# Altium PCB NODE_DEV_V2.PcbDoc
Units mil, origin at the board's own origin, x right, y up, seen from the top; angles counter-clockwise.
Board outline 2340 x 2861.85 mil, 4 copper layers (Top Layer, Signal Layer 1, Signal Layer 2, Bottom Layer), stack 30.634 mil thick; 101 components, 93 nets, 391 pads, 639 vias.
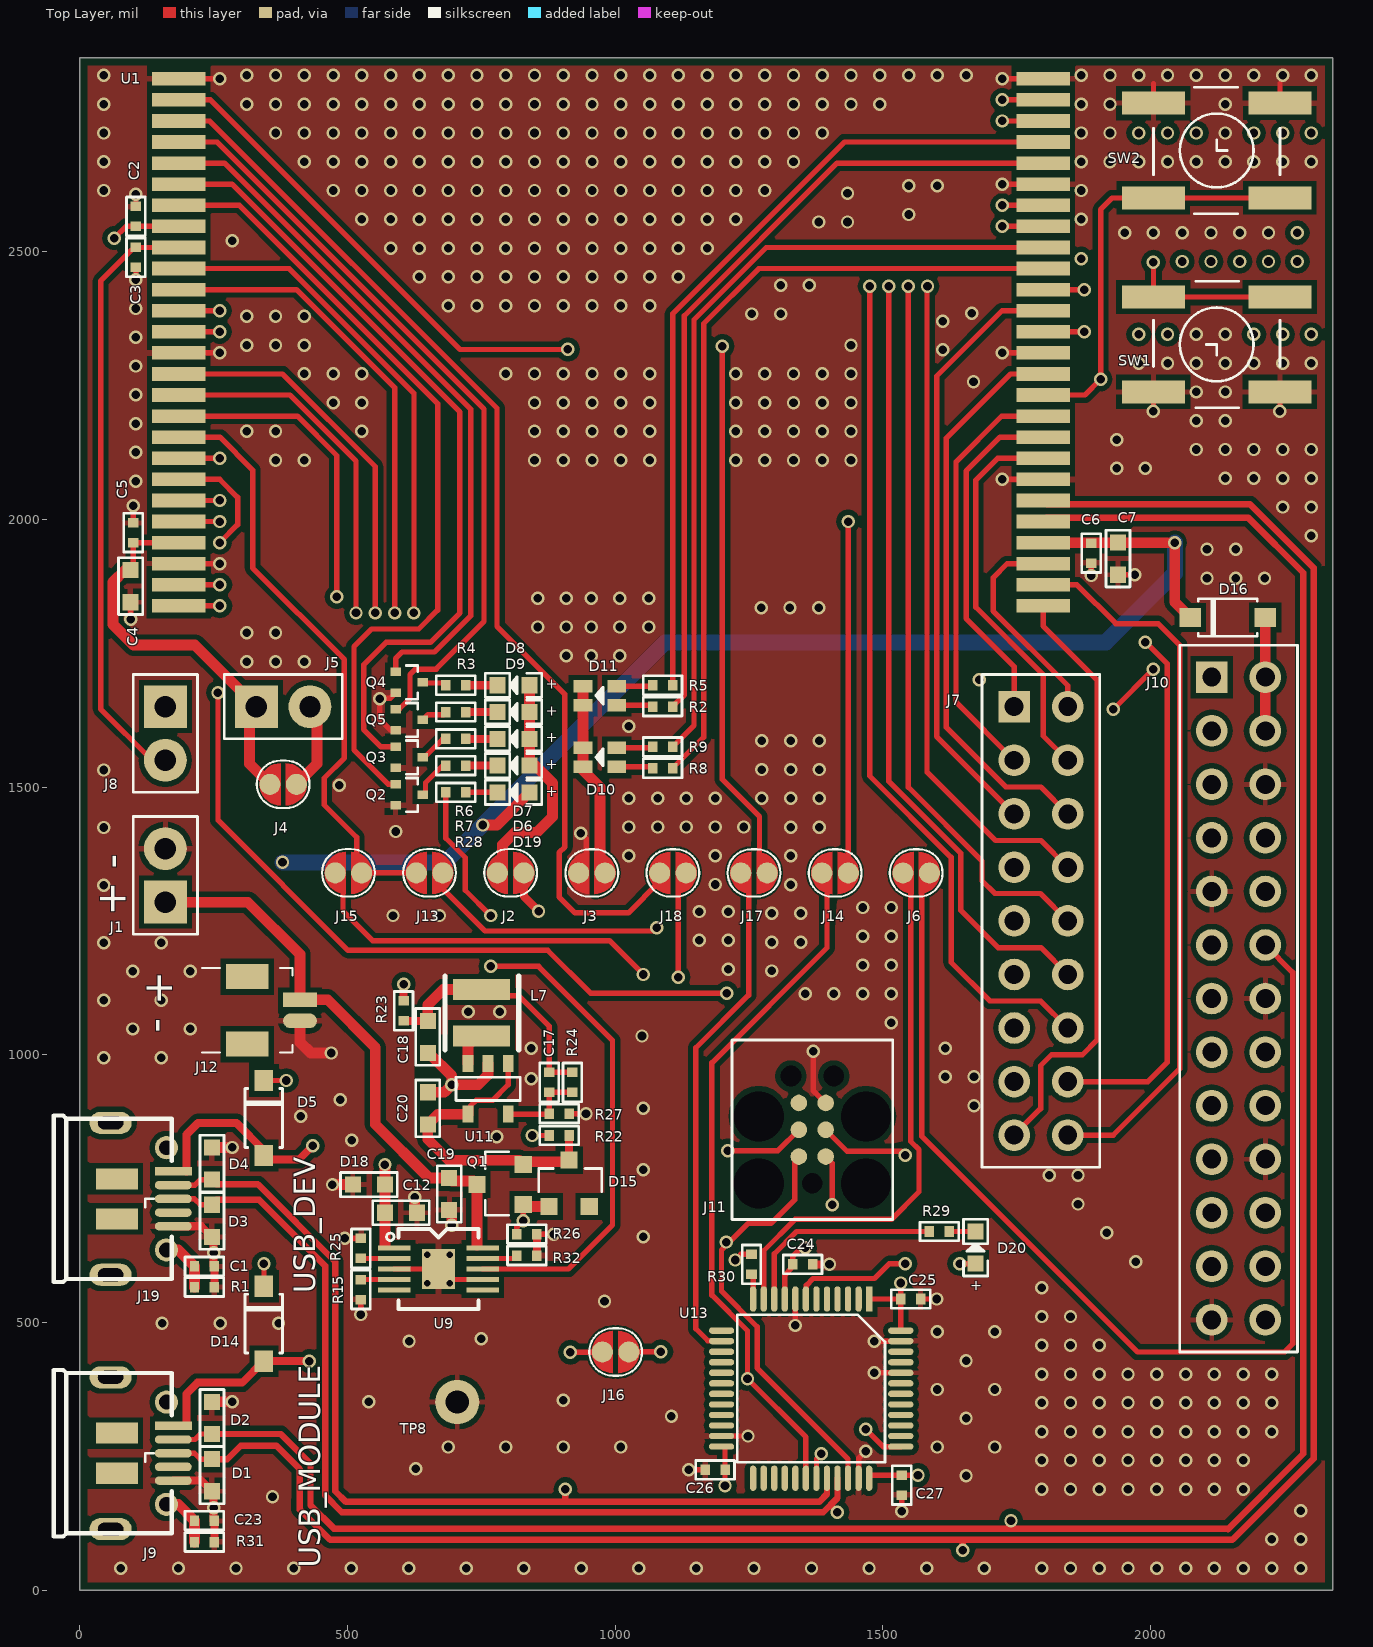
[diagram p0: Top Layer view]
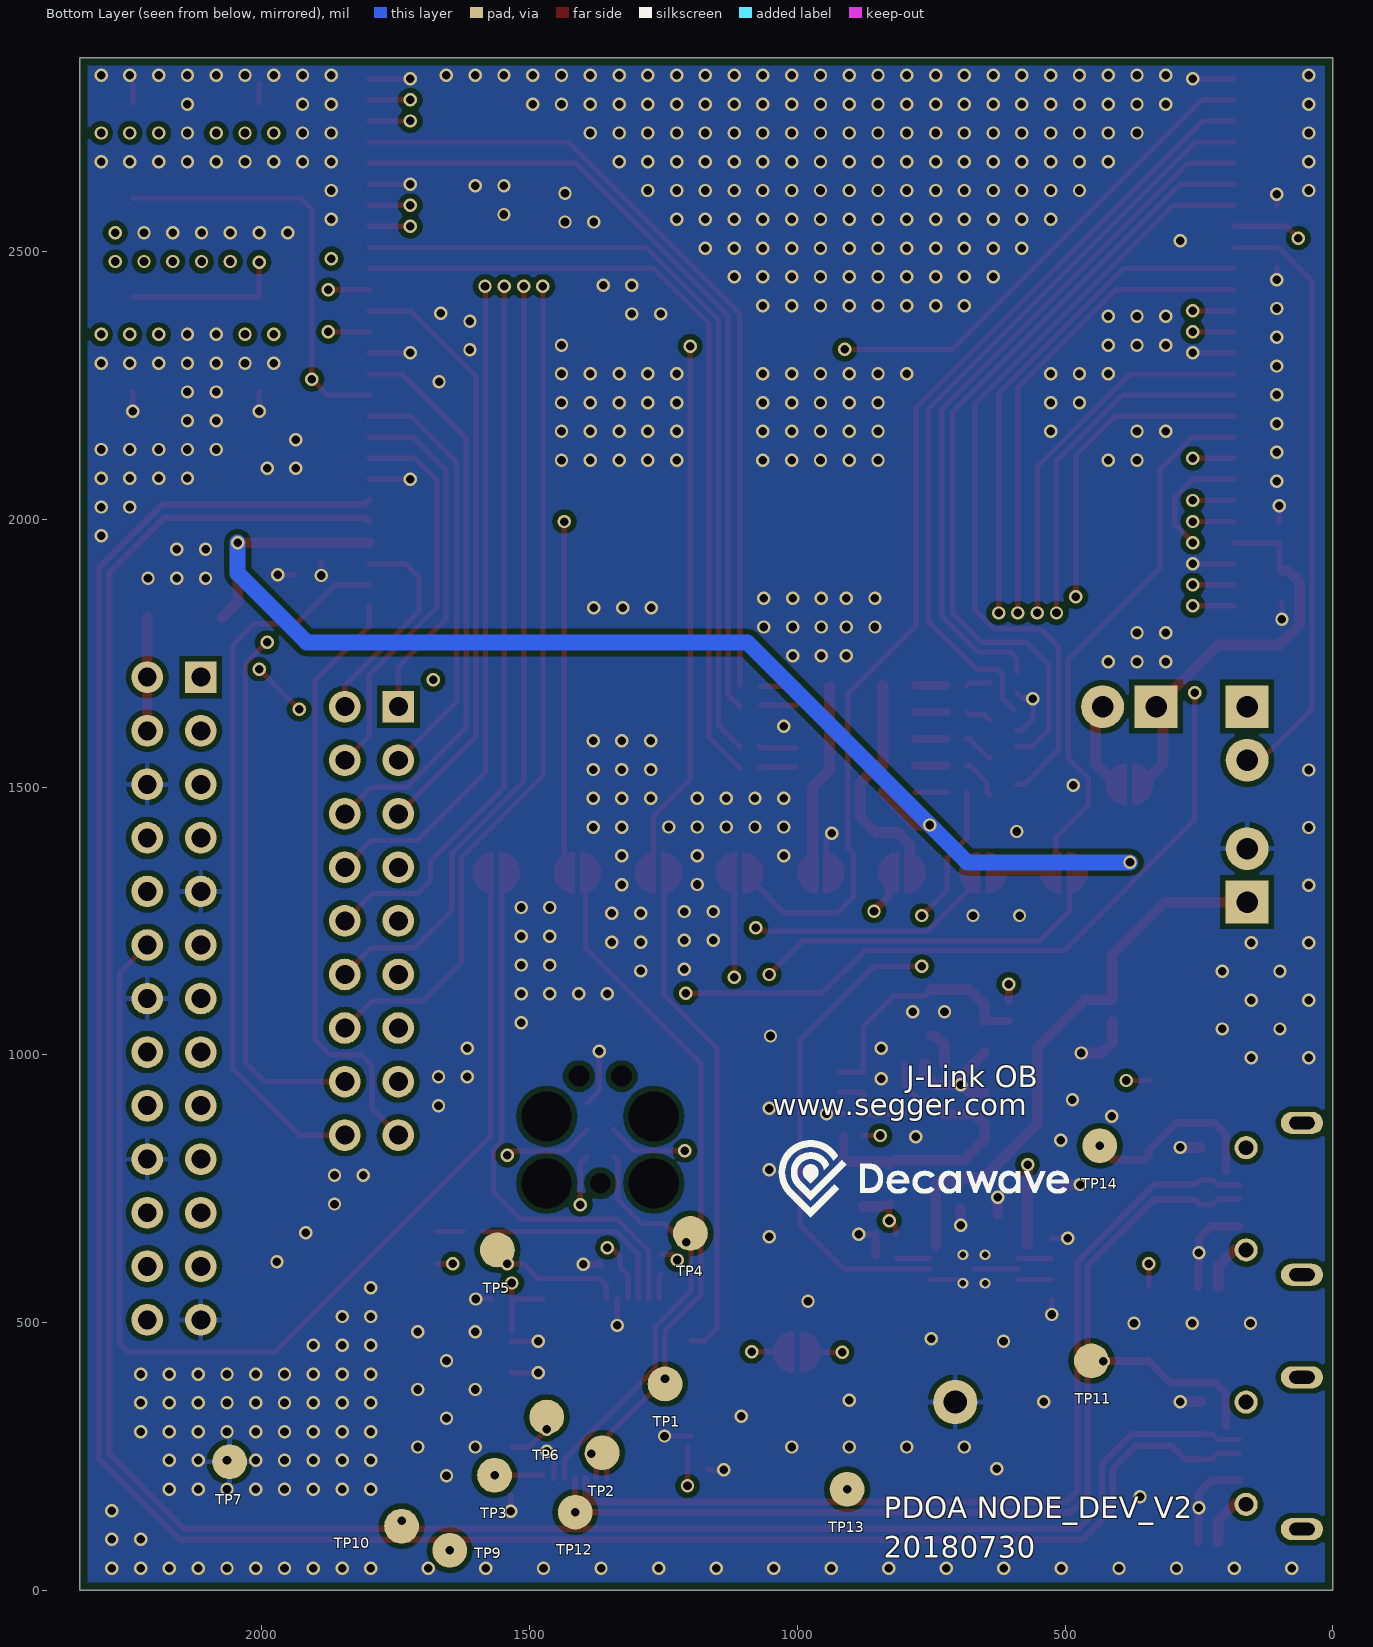
[diagram p1: Bottom Layer view, seen from below]
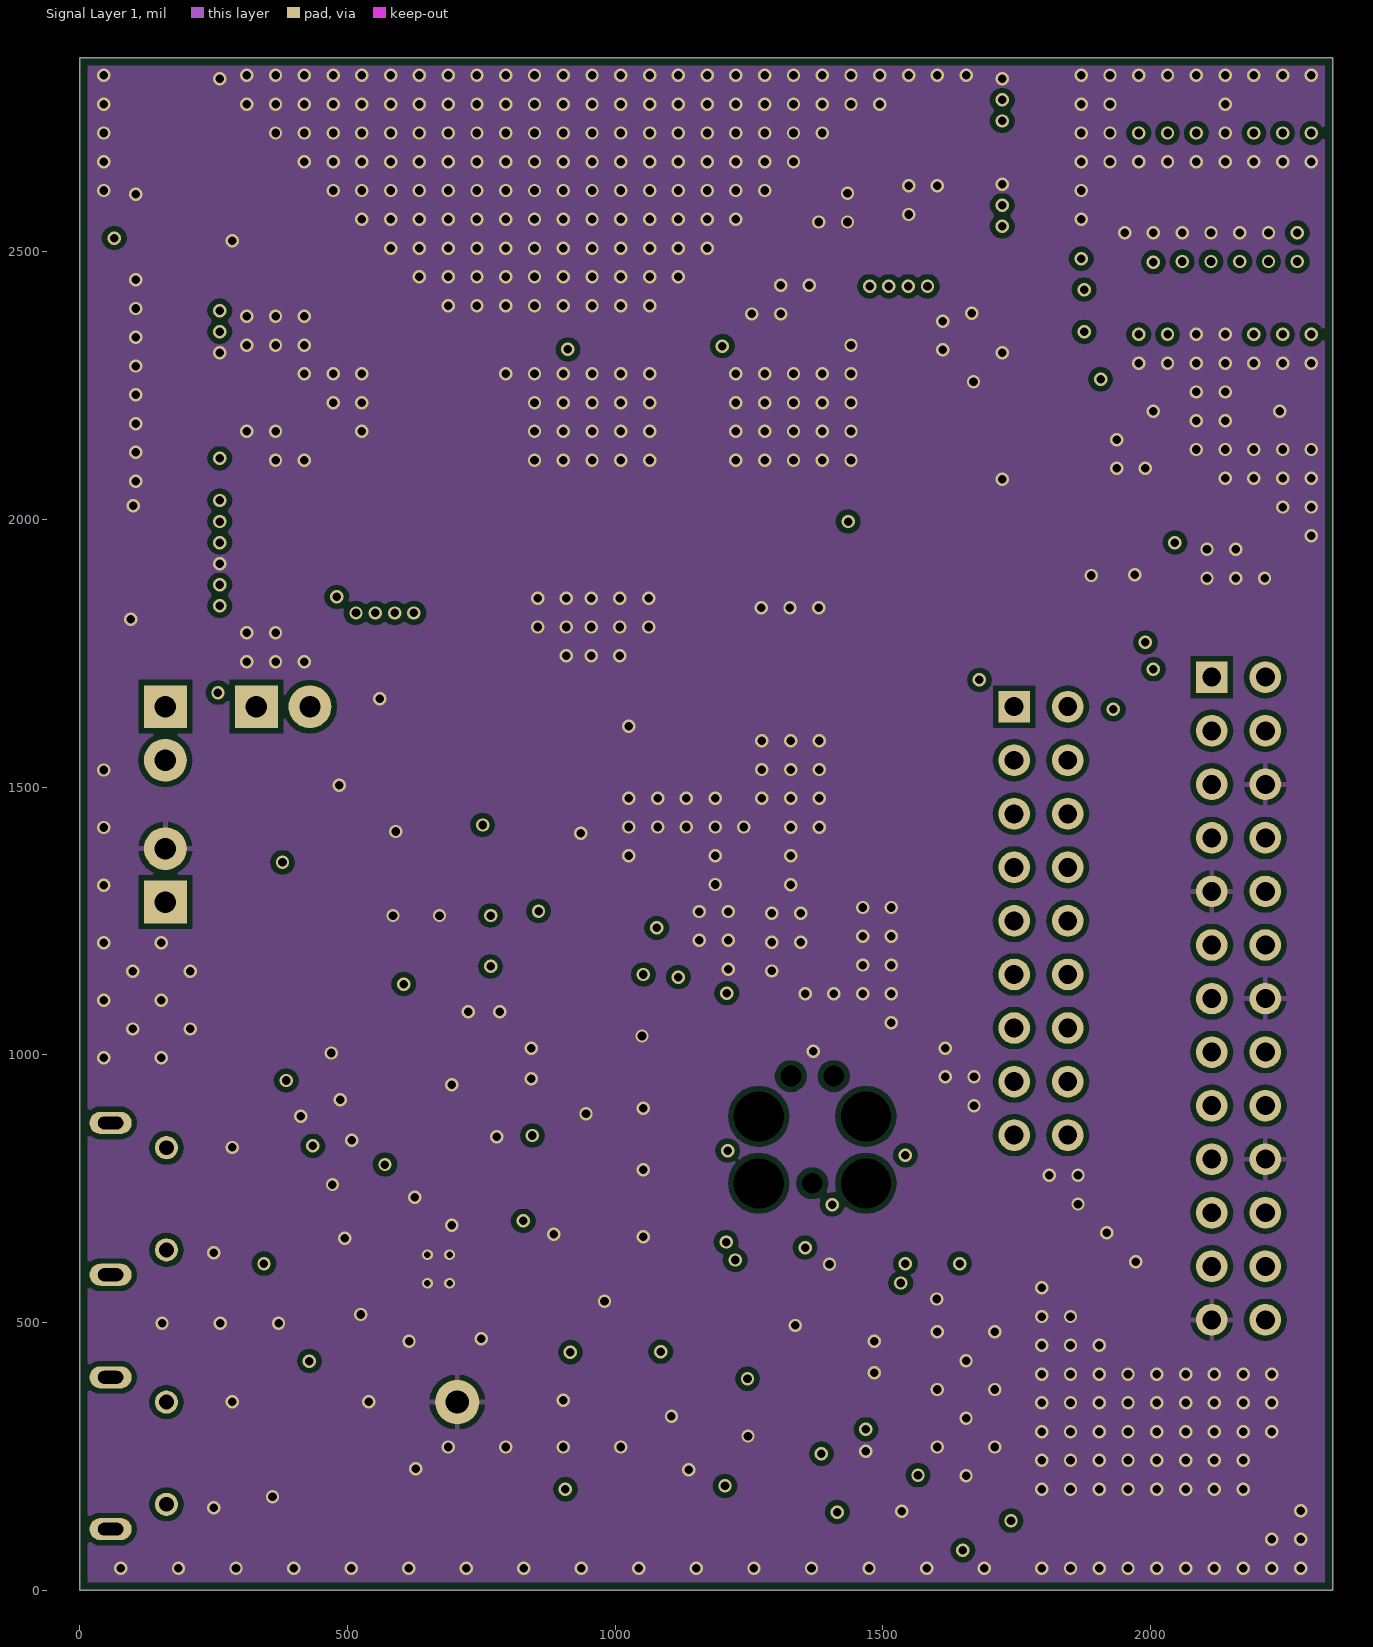
[diagram p2: Signal Layer 1]
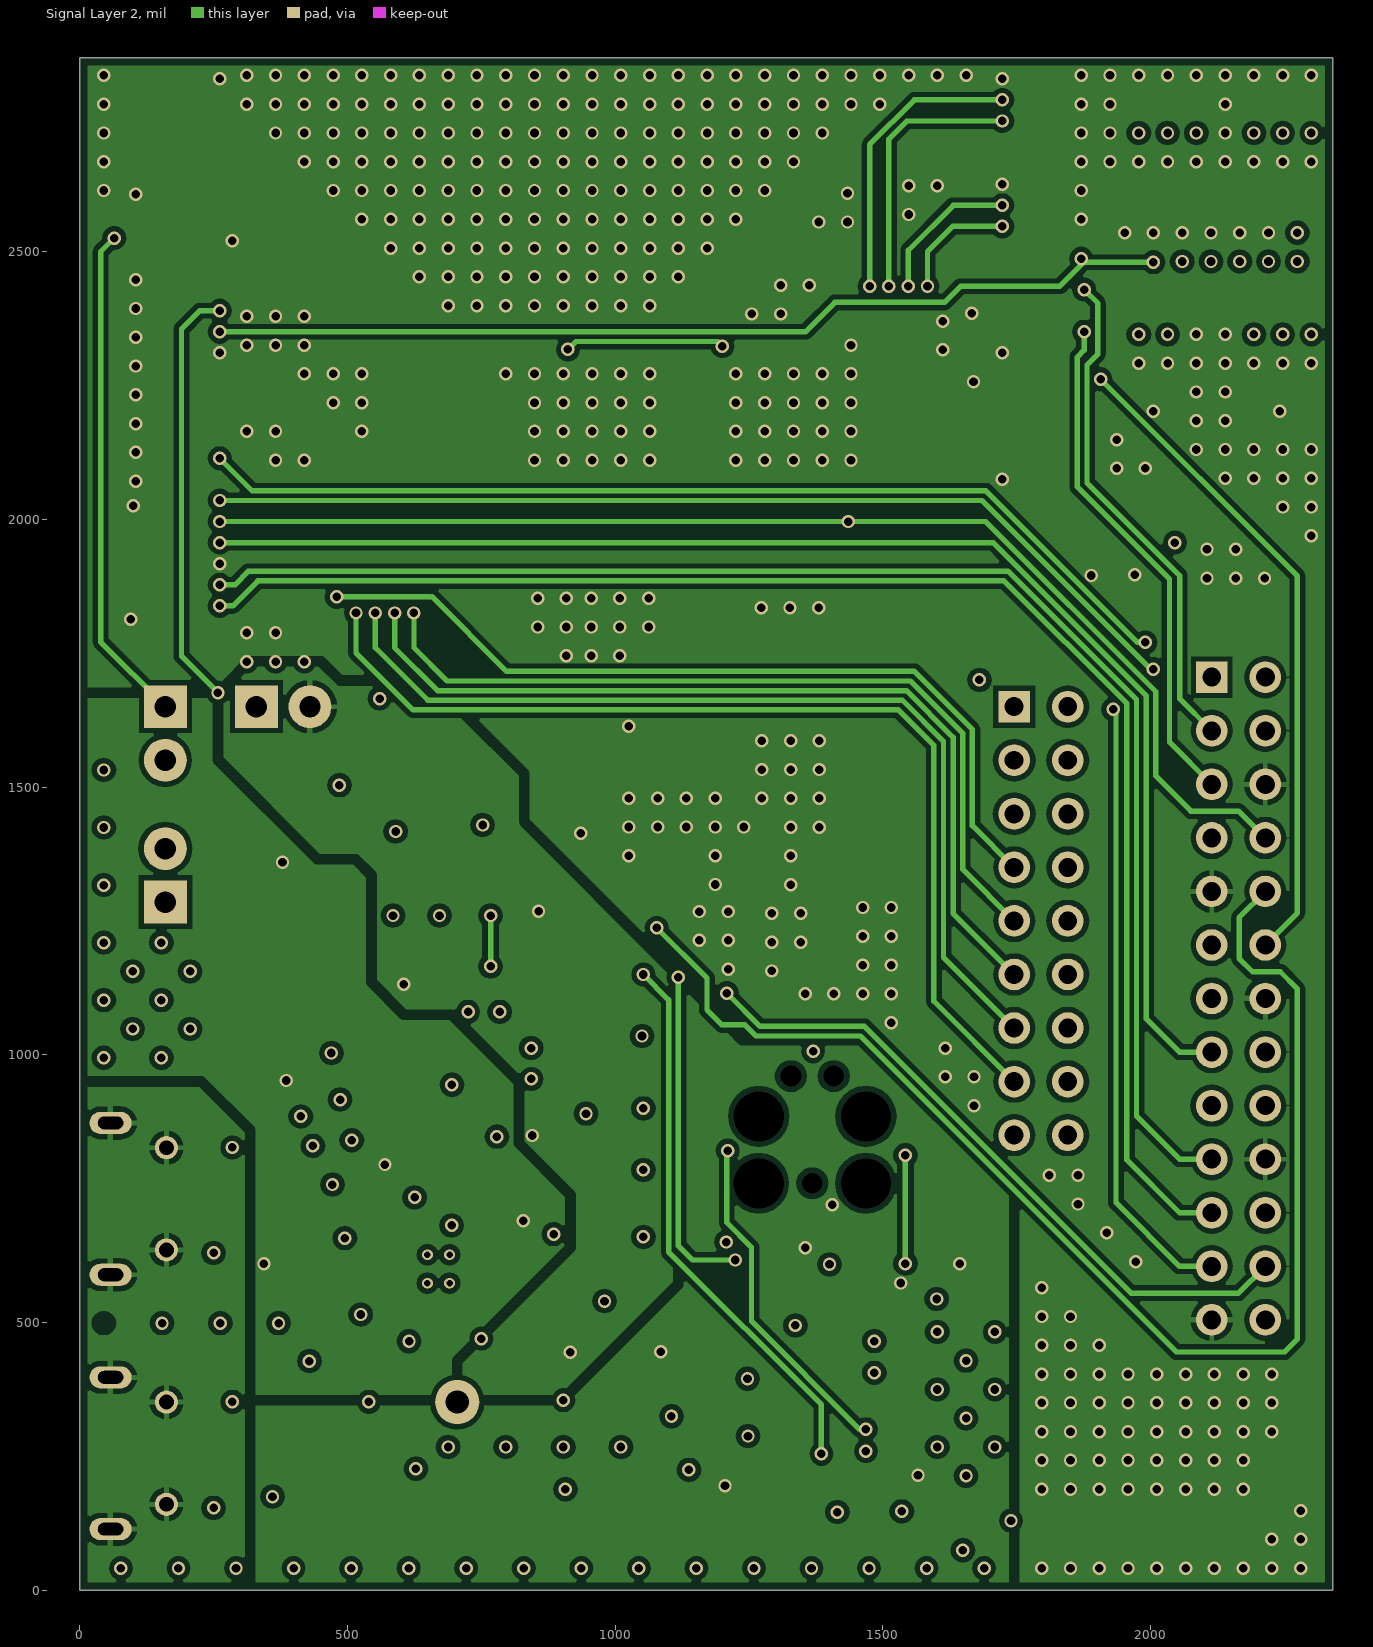
[diagram p3: Signal Layer 2]

## Layer stack, top to bottom
Top Solder: solder mask 0.4, Solder Resist, Dk 3.5
Top Layer: signal copper 1.4
Dielectric 1: core 10, FR-4, Dk 4.2
Signal Layer 1: signal copper 1.417
Dielectric 3: prepreg 5, Dk 4.2
Signal Layer 2: signal copper 1.417
Dielectric 2: core 10, Dk 4.2
Bottom Layer: signal copper 1.4
Bottom Solder: solder mask 0.4, Solder Resist, Dk 3.5

## Board outline
0,0 0,2861.85 2340,2861.85 2340,0

## Design rules (kind name [scope] priority, off if disabled: settings)
Clearance [All] p1 off: gap=8
Clearance Clearance_DRC [All] p2: gap=6
Clearance Clearance_GND [All] p3 off: gap=10
ComponentClearance [All] p1 off: gap=10 collisioncheckmode=3 verticalgap=10 showdistances=FALSE
Height [All] p1 off: minheight=0 maxheight=1000 prefheight=500
HoleSize [All] p1: absolutevalues=TRUE maxlimit=300 minlimit=1 maxpercent=80.000 minpercent=20.000
MinimumSolderMaskSliver [All] p1 off: minsoldermaskwidth=10
PolygonConnect PolygonConnect_1 [isVia] p1: connectstyle=Direct reliefconductorwidth=10 reliefentries=4 polygonreliefangle="90 Angle" airgapwidth=10
PolygonConnect [All] p2: connectstyle=Relief reliefconductorwidth=10 reliefentries=4 polygonreliefangle="90 Angle" airgapwidth=10
RoutingVias [All] p1: holewidth=16 width=25 viastyle="Through Hole" minholewidth=5 minwidth=10 maxholewidth=80 maxwidth=100
SilkToBoardRegionClearance [All] p1 off:
SilkToSilkClearance [All] p1 off: silktosilkclearance=10
SilkToSolderMaskClearance [IsPad] p1 off: minsilkscreentomaskgap=10 clearancetoexposedcopper=TRUE
SolderMaskExpansion [All] p1: expansion=4
Width [All] p1: maxlimit=100 minlimit=4 preferedwidth=10
22 further rules are at their usual default settings.

## Components (designator, comment, footprint, x,y, rotation, side; value= is the part's Value field where it differs from the comment)
C1 "100N" C-SMT-0402 232.96,605 r0 top
C2 "330P" C-SMT-0402 105,2565.49 r270 top
C3 "330P" C-SMT-0402 105,2488.92 r90 top
C4 "10U" C-SMT-0603 95,1875 r270 top
C5 "100N" C-SMT-0402 100,1974.94 r90 top
C6 "100N" C-SMT-0402 1888.9,1936.64 r270 top
C7 "10U" C-SMT-0603 1938.9,1926.34 r270 top
C12 "4U7" C-SMT-0603 600,705 r0 top
C17 "22P" C-SMT-0402 876.8,948.33 r270 top
C18 "10U" C-SMT-0603 650,1033.27 r270 top
C19 "4U7" C-SMT-0603 690,740 r270 top
C20 "4U7" C-SMT-0603 650,900 r90 top
C23 "100N" C-SMT-0402 232.96,130 r0 top
C24 "1U" C-SMT-0402 1350,608.6 r0 top
C25 "100N" C-SMT-0402 1551.79,543.96 r0 top
C26 "100N" C-SMT-0402 1186.4,225 r180 top
C27 "100N" C-SMT-0402 1535,196.4 r270 top
D1 "5V ESD" C-SMT-0603 246.98,214.92 r90 top
D2 "5V ESD" C-SMT-0603 246.98,321.92 r270 top
D3 "5V ESD" C-SMT-0603 246.98,689.92 r90 top
D4 "5V ESD" C-SMT-0603 246.98,796.92 r270 top
D5 "PMEG4020ER" DIO_SOD123 343.77,881.97 r90 top
D6 "R" LED-SMT-0603 810,1540 r270 top
D7 "G" LED-SMT-0603 810,1590 r270 top
D8 "Y" LED-SMT-0603 810,1690 r270 top
D9 "B" LED-SMT-0603 810,1640 r270 top
D10 "DUAL LED" LED_DUAL 939.85,1537.6 r0 top
D11 "DUAL LED" LED_DUAL 939.85,1652.6 r0 top
D14 "PMEG4020ER" DIO_SOD123 343.77,497.97 r90 top
D15 "PMEG2005ET" DIO_SOT23 914,760 r0 top
D16 "PMEG4020ER" DIO_SOD123 2143.88,1816.62 r180 top
D18 "5V ESD" C-SMT-0603 540,757.68 r0 top
D19 "R" LED-SMT-0603 810,1490 r270 top
D20 "R" LED-SMT-0603 1672.94,640 r180 top
J1 "BATT CON" CON-100MIL-02 160,1285 r90 top
J2 "SHORT" PAD_JUMPER 809.68,1339.69 r180 top
J3 "SHORT" PAD_JUMPER 951.29,1339.52 r0 top
J4 "SHORT" PAD_JUMPER 385,1505 r180 top
J5 "CON02" CON-100MIL-02 330,1650 r0 top
J6 "SHORT" PAD_JUMPER 1567.01,1339.52 r180 top
J7 "EXTRA PINS" CON-100MIL-2X09 1745,1649.94 r0 top
J8 "NFC CON" CON-100MIL-02 160,1650 r270 top
J9 "USB_MICRO" USB_MICRO_U6F05E-CXT2-B15 122.15,255.96 r270 top
J10 "RPI Header" CON-100MIL-2X13 2113.88,1705 r0 top
J11 "TC2030-IDC" JLINK_6PIN_ADAPTOR 1368,760 r90 top
J12 "BATT CON" SH02AYS 411.43,1102.68 r270 top
J13 "SHORT" PAD_JUMPER 648.25,1339.69 r0 top
J14 "SHORT" PAD_JUMPER 1415.58,1339.52 r180 top
J15 "SHORT" PAD_JUMPER 506.82,1339.69 r180 top
J16 "SHORT" PAD_JUMPER 995.67,445 r0 top
J17 "SHORT" PAD_JUMPER 1264.15,1339.52 r180 top
J18 "SHORT" PAD_JUMPER 1102.72,1339.52 r0 top
J19 "USB_MICRO" USB_MICRO_U6F05E-CXT2-B15 122.15,730.96 r270 top
L7 "4.7uH" IND_SDB3015 750,1035.33 r90 top
Q1 "AO3407A" FET_SOT23_GSD 785,757.68 r90 top
Q2 "DDTC143ZE-7-F" SOT-523 590,1505 r270 top
Q3 "DDTC143ZE-7-F" SOT-523 590,1575 r270 top
Q4 "DDTC143ZE-7-F" SOT-523 590,1715 r270 top
Q5 "DDTC143ZE-7-F" SOT-523 590,1645 r270 top
R1 "10K" R-SMT-0402 232.96,566 r0 top
R2 "820R" R-SMT-0402 1088.6,1650 r180 top
R3 "1K8" R-SMT-0402 702.19,1640 r180 top
R4 "1K8" R-SMT-0402 702.19,1690 r180 top
R5 "150R" R-SMT-0402 1088.6,1690 r180 top
R6 "1K5" R-SMT-0402 702.19,1590 r180 top
R7 "1K8" R-SMT-0402 702.19,1540 r180 top
R8 "820R" R-SMT-0402 1088.6,1535 r180 top
R9 "150R" R-SMT-0402 1088.6,1575 r180 top
R15 "DNF" R-SMT-0402 525,561.4 r90 top
R22 "DNF" R-SMT-0402 895.4,849.27 r180 top
R23 "0R" R-SMT-0402 605,1081.87 r90 top
R24 "69.8K 1%" R-SMT-0402 920,948.6 r90 top
R25 "1.8K 1%" R-SMT-0402 525,638.6 r270 top
R26 "100K" R-SMT-0402 835,665 r180 top
R27 "15K 1%" R-SMT-0402 895.4,890 r180 top
R28 "2K7" R-SMT-0402 702.19,1490 r180 top
R29 "1K8" R-SMT-0402 1605.29,670 r0 top
R30 "220R" R-SMT-0402 1254.5,608.6 r270 top
R31 "10K" R-SMT-0402 232.96,90 r0 top
R32 "10K" R-SMT-0402 835,625 r180 top
SW1 "TS-06MN" TS-1143S 2241.22,2415 r180 top
SW2 "TS-06MN" TS-1143S 2005,2600 r0 top
TP1 "TXD" PAD/R40MIL-SMD 1247,385.3 r180 bottom
TP2 "RXD" PAD/R40MIL-SMD 1364.36,256.9 r90 bottom
TP3 "3V4_SEGGER" PAD/R40MIL-SMD 1565.32,215 r90 bottom
TP4 "SWDIO_OB" PAD/R40MIL-SMD 1199.47,666.49 r90 bottom
TP5 "#RESET_OB" PAD/R40MIL-SMD 1560,635.49 r90 bottom
TP6 "SWCLK_OB" PAD/R40MIL-SMD 1468,323.57 r90 bottom
TP7 "GND" PAD/R40MIL-SMD 2060,240 r90 bottom
TP8 "GND LOOP CONNECTOR" TP_LOOP_CONNECTOR 705,351.44 r0 top
TP9 "D+_DWM1002" PAD/R40MIL-SMD 1649.08,74.77 r90 bottom
TP10 "D-_DWM1002" PAD/R40MIL-SMD 1739,119.77 r90 bottom
TP11 "MODULE_5V" PAD/R40MIL-SMD 450.79,428.39 r90 bottom
TP12 "D+_DEV" PAD/R40MIL-SMD 1414.66,146 r90 bottom
TP13 "D-_DEV" PAD/R40MIL-SMD 907.01,188.7 r90 bottom
TP14 "DEV_5V" PAD/R40MIL-SMD 435.29,830 r90 bottom
U1 "DWM1002" DWM1002 1799.17,1798.86 r90 top
U9 "BQ24092DGQ" "IC_MSOP10 - TI - DGQ" 670,600 r0 top
U11 "RT8059" SOT23-5 800,983.66 r180 top
U13 "STM32F072CBT6" IC_LQFP48 1365.86,376.64 r270 top
? "" DECAWAVE_LOGO_ARGO 975,760 r0 bottom

## Footprints (in the part's own frame and the unit in brackets; to place one, negate y for a bottom-side part, rotate by r counter-clockwise, add the part's x,y. Pads: shape width x height; smd on the part's side, far side on the other; paste and mask are expansions set on the pad)
C-SMT-0402 [mm] "Chip Resistor, 2-Leads, Body 1.00x0.50mm, IPC Medium Density"
  rect 0.45x0.5 smd: 1(-0.472,0) 2(0.472,0)
  silkscreen extent -0.92,-0.44 0.92,0.44, body extent -0.5,-0.3 0.5,0.3, height 0.2
C-SMT-0603 [mil] "Chip Resistor, 2-Leads, Body 1.60x0.80mm, IPC Medium Density"
  rect 30x30 smd: 1(-30,0) 2(30,0)
  silkscreen extent -53,-23 53,23, body extent -52,-20 51,19, height 35
CON-100MIL-02 [mil]
  rect 80x80 hole 40: 1(0,0)
  round 80 hole 40: 2(100,0)
  silkscreen extent -60,-60 160,60
CON-100MIL-2X09 [mm]
  rect 1.5x1.5 hole 0.9: 1(0,0)
  round 1.5 hole 0.9: 2(2.54,0) 3(0,-2.54) 4(2.54,-2.54) 5(0,-5.08) 6(2.54,-5.08) 7(0,-7.62) 8(2.54,-7.62) 9(0,-10.16) 10(2.54,-10.16) 11(0,-12.7) 12(2.54,-12.7) 13(0,-15.24) 14(2.54,-15.24) 15(0,-17.78) 16(2.54,-17.78) 17(0,-20.32) 18(2.54,-20.32)
  silkscreen extent -1.52,-21.84 4.06,1.52
CON-100MIL-2X13 [mm]
  rect 1.5x1.5 hole 0.9: 1(0,0)
  round 1.5 hole 0.9: 2(2.54,0) 3(0,-2.54) 4(2.54,-2.54) 5(0,-5.08) 6(2.54,-5.08) 7(0,-7.62) 8(2.54,-7.62) 9(0,-10.16) 10(2.54,-10.16) 11(0,-12.7) 12(2.54,-12.7) 13(0,-15.24) 14(2.54,-15.24) 15(0,-17.78) 16(2.54,-17.78) 17(0,-20.32) 18(2.54,-20.32) 19(0,-22.86) 20(2.54,-22.86) 21(0,-25.4) 22(2.54,-25.4) 23(0,-27.94) 24(2.54,-27.94) 25(0,-30.48) 26(2.54,-30.48)
  silkscreen extent -1.52,-32 4.06,1.52
DECAWAVE_LOGO_ARGO [mil]
  silkscreen extent -482,-79 59,63
DIO_SOD123 [mil]
  rect 40x35 smd: 1(-70,0) 2(70,0)
  silkscreen extent -55,-35 55,35, body extent -73,-31 73,32, height 47
DIO_SOT23 [mil]
  rect 32x32 smd: 1(-37.4,-43.31) 2(0,43.31) NC(37.4,-43.31)
  silkscreen extent -57,-16 61,28, body extent -56,-55 58,55, height 51
DWM1002 [mm]
  rect 0.65x2.54 smd: 1(26,41) 2(25,41) 3(24,41) 4(23,41) 5(22,41) 6(21,41) 7(20,41) 8(19,41) 9(18,41) 10(17,41) 11(16,41) 12(15,41) 13(14,41) 14(13,41) 15(12,41) 16(11,41) 17(10,41) 18(9,41) 19(8,41) 20(7,41) 21(6,41) 22(5,41) 23(4,41) 24(3,41) 25(2,41) 26(1,41) 27(1,0) 28(2,0) 29(3,0) 30(4,0) 31(5,0) 32(6,0) 33(7,0) 34(8,0) 35(9,0) 36(10,0) 37(11,0) 38(12,0) 39(13,0) 40(14,0) 41(15,0) 42(16,0) 43(17,0) 44(18,0) 45(19,0) 46(20,0) 47(21,0) 48(22,0) 49(23,0) 50(24,0) 51(25,0) 52(26,0)
FET_SOT23_GSD [mil]
  rect 32x32 smd: D(0,43.31) G(-37.4,-43.31) S(37.4,-43.31)
  silkscreen extent -57,-16 61,28, body extent -56,-55 58,55, height 47
IC_LQFP48 [mm]
  rect 1.2x0.3 smd: 1(-4.25,2.75)
  oval 1.2x0.3 smd: 2(-4.25,2.25) 3(-4.25,1.75) 4(-4.25,1.25) 5(-4.25,0.75) 6(-4.25,0.25) 7(-4.25,-0.25) 8(-4.25,-0.75) 9(-4.25,-1.25) 10(-4.25,-1.75) 11(-4.25,-2.25) 12(-4.25,-2.75) 25(4.25,-2.75) 26(4.25,-2.25) 27(4.25,-1.75) 28(4.25,-1.25) 29(4.25,-0.75) 30(4.25,-0.25) 31(4.25,0.25) 32(4.25,0.75) 33(4.25,1.25) 34(4.25,1.75) 35(4.25,2.25) 36(4.25,2.75)
  oval 0.3x1.2 smd: 13(-2.75,-4.25) 14(-2.25,-4.25) 15(-1.75,-4.25) 16(-1.25,-4.25) 17(-0.75,-4.25) 18(-0.25,-4.25) 19(0.25,-4.25) 20(0.75,-4.25) 21(1.25,-4.25) 22(1.75,-4.25) 23(2.25,-4.25) 24(2.75,-4.25) 37(2.75,4.25) 38(2.25,4.25) 39(1.75,4.25) 40(1.25,4.25) 41(0.75,4.25) 42(0.25,4.25) 43(-0.25,4.25) 44(-0.75,4.25) 45(-1.25,4.25) 46(-1.75,4.25) 47(-2.25,4.25) 48(-2.75,4.25)
  silkscreen extent -3.5,-3.5 3.5,3.5, body extent -4.5,-4.5 4.5,4.5, height 1.6
"IC_MSOP10 - TI - DGQ" [mm] "MSOP10 WITH THERMAL PAD TI DGQ PACKAGE"
  rect 1.57x1.88 smd: 0(0,0)
  rect 1.55x0.25 smd: 1(-2.1,1) 2(-2.1,0.5) 3(-2.1,0) 4(-2.1,-0.5) 5(-2.1,-1) 6(2.1,-1) 7(2.1,-0.5) 8(2.1,0) 9(2.1,0.5) 10(2.1,1)
  silkscreen extent -2.46,-1.9 1.9,1.9, body extent -2.52,-1.55 2.52,1.55, height 1.1
IND_SDB3015 [mm]
  rect 1x2.7 smd: 1(0,0) 2(2.2,0)
  silkscreen extent -0.66,-1.77 2.84,1.73, body extent -0.41,-1.52 2.59,1.48, height 1.5
JLINK_6PIN_ADAPTOR [mm]
  round 0.787 smd paste-10: 1(1.27,-0.635) 2(1.27,0.635) 3(2.54,-0.635) 4(2.54,0.635) 5(3.81,-0.635) 6(3.81,0.635)
  round 0 hole 2.375 unplated: ""(0,2.54) ""(0,-2.54) ""(3.175,-2.54) ""(3.175,2.54)
  round 0 hole 0.991 unplated: ""(0,0) ""(5.08,-1.016) ""(5.08,1.016)
  silkscreen extent -1.71,-3.81 6.79,3.81
LED-SMT-0603 [mil]
  rect 30x30 smd: A(0,30) K(0,-30)
  silkscreen extent -23,-53 23,53, body extent -15,-34 16,33, height 26
LED_DUAL [mm] "19-22_VRVGC/TR8"
  rect 0.9x0.6 smd: 1(1.6,0.9) 2(0,0.9) 3(1.6,0) 4(0,0)
  silkscreen extent 0.6,0.05 0.96,0.86, body extent 0,-0.2 1.6,1.1, height 0.32
PAD/R40MIL-SMD [mil]
  round 65 smd: 1(0,0)
PAD_JUMPER [mm] "SOLDER BRIDGE JUMPER"
  round 1 smd mask-15: 1(-0.5,0) 2(0.754,0)
  Top Layer region: 0.254,-1 0.254,1 0.688,0.901 1.036,0.623 1.229,0.223 1.229,-0.223 1.036,-0.623 0.688,-0.901 0.254,-1
  Top Layer region: 0,-1 -0.434,-0.901 -0.782,-0.623 -0.975,-0.223 -0.975,0.223 -0.782,0.623 -0.434,0.901 0,1 0,1
  silkscreen extent -1.13,-1.13 1.38,1.13
R-SMT-0402 [mm] "Chip Resistor, 2-Leads, Body 1.00x0.50mm, IPC Medium Density"
  rect 0.45x0.5 smd: 1(-0.472,0) 2(0.472,0)
  silkscreen extent -0.92,-0.44 0.92,0.44, body extent -0.5,-0.25 0.5,0.25, height 0.35
SH02AYS [mm]
  rect 1.2x2 smd: 0(-1.1,-2.5) 0(2.1,-2.5)
  rect 0.7x1.6 smd: 1(0,0)
  oval 0.7x1.6 smd: 2(1,0)
  silkscreen extent -1.5,-4.65 2.5,-0.35, body extent -1.5,-4.58 2.5,0.47, height 3.15
SOT23-5 [mil]
  rect 20x32 smd: 1(0,0) 2(37.4,0) 3(74.8,0) 4(74.8,94.49) 5(0,94.49)
  silkscreen extent -23,26 97,69, body extent -20,-9 94,101, height 57
SOT-523 [mm]
  rect 0.4x0.51 smd: 1(0,0) 2(1,0) 3(0.5,1.29)
  silkscreen extent -0.3,0.5 1.3,1.04
TP_LOOP_CONNECTOR [mm]
  round 2.1 hole 1.1: 1(0,0)
  body extent -1.7,-1.42 1.65,1.58, height 5.36
TS-1143S [mm]
  rect 3x1.1 smd: 1(0,0) 2(6,0) 3(0,4.5) 4(6,4.5)
  silkscreen extent 0,-0.75 6,5.25, body extent -0.25,-1.01 6.25,5.49, height 7
USB_MICRO_U6F05E-CXT2-B15 [mm]
  rect 0.4x1.75 smd: 1(-1.3,1.338)
  oval 0.4x1.75 smd: 2(-0.65,1.338) 3(0,1.338) 4(0.65,1.338) 5(1.3,1.338)
  rect 1x2 smd: 6(-0.95,-1.338) 6(0.95,-1.338)
  oval 1.05x2 hole 0.6 slot 1.2 at 90 deg: A(-3.6,-1.637) B(3.6,-1.637)
  round 1.1 hole 0.7: C(-2.425,1.013) D(2.425,1.013)
  silkscreen extent -3.95,-4.34 3.95,1.26, body extent -3.94,-4.37 3.96,1.38, height 2.7

## Part data
C1 C2 C3 C4 C5 C6 C7 C12 C17 C18 C19 C20 C23 C24 C25 C26 C27: library part C-SMT-0402, "*C-SMT-0402"
D1 D2 D3 D4 D5 D14 D15 D16 D18: library part DIODE_SCHOTTKY, "Diode"
D6 D7 D8 D9 D19 D20: library part LED, "LED"
D10 D11: library part LED_X2
J1 J8 J12: library part CON02, "2 pin Connector"
J2 J3 J4 J6 J13 J14 J15 J16 J17 J18: library part JUMPER_OPEN
J5: "2 pin Connector"
J7: library part CON(2X09)_1
J9 J19: library part CON05_USB_2, "USB-MR1-05-TH-MB"
J10: library part RPI_HEADER_SHORT
J11: "J-Link 6-pin Programming Pads"
L7: library part L, "INDUCTOR"
Q1: library part MOSFET-P1, "P-MOSFET"
Q2 Q3 Q4 Q5: library part TR_NPN, "TRANSISTOR NPN"
R1 R2 R3 R4 R5 R6 R7 R8 R9 R15 R22 R23 R24 R25 R26 R27 R28 R29 R30 R31 R32: library part R-SMT-0402, "*R-SMT-0402"
SW1 SW2: library part TACT_SW/4PIN
TP1 TP2 TP3 TP4 TP5 TP6 TP7 TP8 TP9 TP10 TP11 TP12 TP13 TP14: library part "TEST POINT_1", "TEST POINT"
U13: library part STM32F072CxU6, "J-LINK MCU"

## Free pads (board coordinates)
  round 60 smd: ""(-157.48,118.11) ""(-118.11,7905.67) ""(5014.47,118.11) ""(5014.47,7905.67)
  round 60 smd far side: ""(-157.48,236.22) ""(-118.11,8392.56) ""(5014.47,236.22) ""(5014.47,8392.56)
  round 0 hole 118.11: ""(-118.11,8141.89) ""(-118.11,-118.11) ""(5014.47,-118.11) ""(5014.47,8141.89)

## Via types
v1: diameter 25, hole 16, Top Layer to Bottom Layer, tented both sides, 635 vias
v2: diameter 20, hole 12, Top Layer to Bottom Layer, 4 vias

## Nets (pads, with @x,y where several pads share a name; then routed paths per layer and width w, separated by ;. In a path a pad name is that pad's centre, name@x,y a point inside that pad or via, vN(x,y) a via of type N, cw(c..) or ccw(c..) an arc to the next point about the centre after c; other vN are vias at no path point)
3V4: J2.1 J4.1 J5.2 J16.1 R22.2 R23.2 | length 371.7
  Top Layer w10: v1(845.34,849.27) R22.2 ; v1@916.35,444.83 J16.1@975.99,444.83
  Top Layer w15: R23.2 v1(605,1131.93) ; J2.1 829.37,1295.71 v1(856.83,1268.25)
  Top Layer w20: J4.1 443.04,1543.36 443.04,1636.96 J5.2
  other v1: 916.35,444.47
3V4_SEGGER: C24.1 C25.1 C26.1 C27.1 D20.A J11.1 J16.2 TP3.1 U13.1 U13.9 U13.24 U13.36 U13.48 | length 605.6
  Top Layer w10: J16.2@1025.36,445.17 v1@1085,445.17 ; v1(1205,195) U13.24@1205,268.37 ; U13.9 1316.65,589.05 C24.1@1330,602.4 ; C24.1 1331.4,623.4 1348,640 v1(1354.58,640) ; J11.1 1405,798 v1(1405,720.28) ; U13.36@1474.13,215 C27.1 v1(1565.32,215) ; U13.1 C25.1 ; U13.48 C25.1 ; v1(1533.19,573.84) C25.1 ; v1(1643.06,610) D20.A
  other v1: 1085,445.53
5V: C6.1 C7.1 C12.1 D5.2 D14.2 D15.1 D16.2 D18.2 D19.A Q1.G R26.2 U1.30 U9.1 | length 2801.4
  Top Layer w10: D5.2 v1(385.67,951.97) ; D14.2@344.05,567.97 v1(344.05,609.88) ; R26.2 816.4,678.01 v1(828.31,689.92) Q1.G
  Top Layer w20: 570,645 C12.1 D18.2 v1(570,795) ; v1(752.39,1429.11) 779.11,1429.11 D19.A ; Q1.G 831.89,716.69 D15.1 ; U1.30 C7.1 v1(2045,1956.34) 2045,1845.5 D16.2
  Bottom Layer w30: v1(378.7,1359.38) 682.65,1359.38 v1(752.39,1429.11) 1093.13,1769.85 1916.08,1769.85 2045,1898.78 v1(2045,1956.34)
#RESET_OB: J11.3 TP5.1 U13.7 | length 598.3
  Top Layer w10: U13.7 1356.8,544.74 1356.8,569.51 1369.51,582.22 1484.02,582.22 1511.8,610 v1(1541.68,610) ; J11.3 1433.25,819.75 1534.27,819.75 v1(1541.68,812.34)
  Signal Layer 2 w10: v1(1541.68,610) v1(1541.68,812.34)
BT_WAKE_UP: SW1.1 SW1.2 U1.13 | length 2175
  Top Layer w10: U1.13 v1(261.46,2350.04) ; v1(2005,2479.96) SW1.2 SW1.1
  Signal Layer 2 w10: v1(261.46,2350.04) 1355.04,2350.04 1410,2405 1615,2405 1645,2435 1830,2435 1874.96,2479.96 v1(2005,2479.96)
  other v1: 1870.15,2486.42
CS_RPI: J10.24 U1.12 | length 3449.5
  Top Layer w10: U1.12 v1(261.46,2389.41) ; v1(258.15,1676.18) 258.15,1438.11 501.27,1195 874,1195 954,1115 v1(1208.25,1115)
  Signal Layer 2 w10: v1(258.15,1676.18) 190,1744.34 190,2355 224.41,2389.41 v1(261.46,2389.41) ; v1(1208.25,1115) 1270.32,1052.93 1465.34,1052.93 1963.27,555 2163.88,555 J10.24
CTS: U13.17
D+_DEV: D3.2 J19.3 TP12.1 U13.33 | length 1806.3
  Top Layer w10: J19.3 214.36,730.96 225.41,719.92 D3.2
  Top Layer w12: D3.2 256,728.93 335.03,728.93 458.14,605.82 458.14,177.21 489.35,146 1388.58,146 1415.08,172.5 U13.33 ; 1402.32,158.33 v1(1414.66,146)
D+_DWM1002: D1.2 J9.3 TP9.1 U1.32 | length 4563.1
  Top Layer w10: J9.3 214.36,255.96 225.41,244.92 D1.2
  Top Layer w12: D1.2 275.39,244.92 300.48,270 367.42,270 411,226.42 411,150.72 467.48,94.23 2152.52,94.23 2304,245.72 2304,1909.28 2185.3,2027.98 1806.27,2027.98 U1.32 ; v1(1649.08,74.77) 1649.08,93.31
D-_DEV: D4.2 J19.2 TP13.1 U13.32 | length 1784.7
  Top Layer w10: J19.2 214.91,756.55 225.27,766.92 D4.2
  Top Layer w12: D4.2 255.93,757.96 332.87,757.96 477.14,613.69 477.14,185.08 497.22,165 1380.71,165 1395.39,179.68 U13.32 ; 907.01,165 v1(907.01,188.7)
D-_DWM1002: D2.2 J9.2 TP10.1 U1.31 | length 4482.4
  Top Layer w10: J9.2 214.91,281.55 225.27,291.92 D2.2
  Top Layer w12: D2.2 375.2,291.92 431,236.12 431,159 474.77,115.23 2143.23,115.23 2144.23,114.23 2285,255 2285,1900 2182.51,2002.49 1805.95,2002.49 U1.31 ; 1739,115.23 v1(1739,130)
EARTH: C1.1 C23.1 J9.A J9.B J9.C J9.D J19.A J19.B J19.C J19.D R1.1 R31.1 | length 208.9
  Top Layer w20: J9.D 183.87,160.49 C23.1 R31.1 ; J19.D 183.87,635.49 C1.1 R1.1
GND: C1.2 C2.1 C3.1 C4.2 C5.2 C6.2 C7.2 C12.2 C18.2 C19.2 C20.2 C23.2 C24.2 C25.2 C26.2 C27.2 D1.1 D2.1 D3.1 D4.1 D18.1 J1.2 J3.1 J9.5 J10.6 J10.9 J10.14 J10.20 J10.25 J11.5 J12.2 J19.5 Q2.2 Q3.2 Q4.2 Q5.2 R1.2 R15.1 R25.1 R26.1 R27.1 R31.2 R32.1 SW1.3 SW1.4 SW2.3 SW2.4 TP7.1 TP8.1 U1.1 U1.14 U1.24 U1.33 U1.39 U1.47 U1.52 U9.0 U9.3 U9.7 U11.2 U13.8 U13.23 U13.35 U13.44 U13.47 | length 2643.5
  Top Layer w10: v1(95,1813.54) C4.2 ; C5.2 v1(100,2025) ; v1(105,2447.28) C3.1 ; C2.1 v1(105,2607.13) ; U1.24 v1(261.46,1916.97) ; U1.14 v1(261.46,2310.67) ; U1.1 v1(261.46,2822.48) ; v1(495,657.48) R25.1@525,657.48 ; v1(524.72,515) R15.1@524.72,542.8 ; U9.3 U9.0 ; Q5.2 581.51,1605.63 560,1627.14 v1(560,1665) 560.87,1665.87 580.24,1665.87 Q4.2 ; U9.0@689.68,580.32 U9.7 ; R26.1 v1(885.06,665) ; R27.1 v1(945.46,890) ; v1(935.97,1413.5) 946.15,1403.32 946.15,1378.55 ; v1(1137.48,225) C26.2 ; U13.23 v1(1247.96,288.05) ; v1(1336.34,494.54) U13.8 ; v1(1369.51,1006.58) 1369.51,933.49 J11.5 ; U13.35 1454.45,246.45 v1(1468,260) ; v1(1483.77,406.16) U13.44 ; v1(1483.77,465.22) U13.47 ; v1(1535,147.48) C27.2 ; C25.2 v1(1600.27,543.96) ; v1(1722.71,2074.45) U1.33 ; v1(1722.71,2310.67) U1.39 ; v1(1722.71,2625.63) U1.47 ; v1(1722.71,2822.48) U1.52 ; v1(1888.9,1895) C6.2 ; C7.2 v1(1970.36,1896.34) ; v1(2005,2201.96) SW1.4 ; SW2.3 2005,2813.04 ; v1(2241.22,2201.96) SW1.3 ; SW2.4 2241.22,2813.04
  Top Layer w15: J9.5 227.11,204.78 D1.1 ; J19.5 227.11,679.78 D3.1 250,656.9 v1(250,630) 250,606.56 C1.2 R1.2 ; D1.1@246.98,183.92 250,180.9 v1(250,154) 250,130.56 C23.2@251.56,129 ; R31.2 C23.2@251.56,129 ; C23.2 C23.2@251.56,129 ; R32.1 R26.1 ; C24.2 v1(1400.06,608.6)
  Top Layer w20: D2.1 v1(285,351.92) ; D4.1 v1(285,826.92) ; J12.2 411.43,1023.57 431.73,1003.27 v1(470,1003.27) ; v1(471.98,757.68) D18.1 ; C12.2@625.47,702.78 v1(625.47,733.66) ; C20.2 681,930 v1(695,944) ; C18.2 652.05,1003.27 695,960.32 v1(695,944) ; v1(694.53,681.34) C19.2@694.53,712.22 ; U11.2 762.6,962.6 744,944 v1(695,944)
  other v1: 76.96,41.27 184.42,41.27 291.88,41.27 399.35,41.27 506.81,41.27 614.27,41.27 721.73,41.27 829.19,41.27 936.65,41.27 1044.11,41.27 1151.58,41.27 1259.04,41.27 1366.5,41.27 1473.96,41.27 1581.42,41.27 1688.88,41.27 1796.35,41.27 1850.08,41.27 1903.81,41.27 1957.54,41.27 2011.27,41.27 2065,41.27 2118.73,41.27 2172.46,41.27 2226.19,41.27 2279.92,41.27 2226.19,95 2279.92,95 2279.92,148.73 360,175 1796.35,188.81 1850.08,188.81 1903.81,188.81 1957.54,188.81 2011.27,188.81 2065,188.81 2118.73,188.81 2172.46,188.81 1655.08,213.81 627.83,227.03 1796.35,242.54 1850.08,242.54 1903.81,242.54 1957.54,242.54 2011.27,242.54 2065,242.54 2118.73,242.54 2172.46,242.54 688.08,267.54 795.54,267.54 903,267.54 1010.46,267.54 1601.35,267.54 1708.81,267.54 1796.35,296.27 1850.08,296.27 1903.81,296.27 1957.54,296.27 2011.27,296.27 2065,296.27 2118.73,296.27 2172.46,296.27 2226.19,296.27 1655.08,321.27 1105,325 1796.35,350 1850.08,350 1903.81,350 1957.54,350 2011.27,350 2065,350 2118.73,350 2172.46,350 2226.19,350 540,351.92 903,355 1601.35,375 1708.81,375 1796.35,403.73 1850.08,403.73 1903.81,403.73 1957.54,403.73 2011.27,403.73 2065,403.73 2118.73,403.73 2172.46,403.73 2226.19,403.73 1655.08,428.73 1796.35,457.46 1850.08,457.46 1903.81,457.46 615,465 750,470 1601.35,482.46 1708.81,482.46 153.76,498.78 262.53,498.78 371.29,498.78 1796.35,511.19 1850.08,511.19 980,540 1796.35,564.92 1971.67,613.81 1052.49,660 1917.93,667.54 1864.2,721.27 1810.47,775 1864.2,775 1052.49,785 507.94,840.44 779.11,847 412.76,885 1052.49,900 1670,905 486.22,916.22 843.36,955 1616.27,958.73 1670,958.73 45,994.49 152.46,994.49 843.06,1012.46 1616.27,1012.46 1050,1035 98.73,1048.22 206.19,1048.22 1515.77,1060.08 725.2,1080.17 784.28,1080.17 45,1101.95 152.46,1101.95 1354.58,1113.81 1408.31,1113.81 1462.04,1113.81 1515.77,1113.81 98.73,1155.68 206.19,1155.68 1292.47,1156.5 1210.76,1160 1462.04,1167.54 1515.77,1167.54 45,1209.41 152.46,1209.41 1292.47,1210.23 1346.2,1210.23 1157.03,1213.73 1210.76,1213.73 1462.04,1221.27 1515.77,1221.27 585,1260 671.92,1260 1292.47,1263.96 1346.2,1263.96 1157.03,1267.46 1210.76,1267.46 1462.04,1275 1515.77,1275 45,1316.87 1186.55,1317.9 1327.46,1317.69 1327.46,1371.42 1025.36,1371.63 1186.55,1371.63 590,1416.96 45,1424.33 1025.36,1425.36 1079.09,1425.36 1132.82,1425.36 1186.55,1425.36 1240.28,1425.36 1327.46,1425.15 1381.19,1425.15 1025.36,1479.09 1079.09,1479.09 1132.82,1479.09 1186.55,1479.09 1273.73,1478.88 1327.46,1478.88 1381.19,1478.88 485,1503.38 45,1531.8 1273.73,1532.62 1327.46,1532.62 1381.19,1532.62 1273.73,1586.35 1327.46,1586.35 1381.19,1586.35 1025.36,1613.67 311.96,1734.19 365.69,1734.19 419.42,1734.19 908.73,1745 955,1745 1008.73,1745 311.96,1787.92 365.69,1787.92 855,1798.73 908.73,1798.73 955,1798.73 1008.73,1798.73 1062.46,1798.73 1272.54,1835 1326.27,1835 1380,1835 855,1852.46 908.73,1852.46 955,1852.46 1008.73,1852.46 1062.46,1852.46 2105,1890 2158.73,1890 2212.46,1890 2105,1943.73 2158.73,1943.73 2300,1969.04 2246.27,2022.77 2300,2022.77 105,2071.17 2138.81,2076.5 2192.54,2076.5 2246.27,2076.5 2300,2076.5 1936.27,2095 1990,2095 365.69,2110.31 419.42,2110.31 849.27,2110.31 903,2110.31 956.73,2110.31 1010.46,2110.31 1064.19,2110.31 1225.38,2110.31 1279.11,2110.31 1332.84,2110.31 1386.58,2110.31 1440.31,2110.31 105,2124.9 2085.08,2130.23 2138.81,2130.23 2192.54,2130.23 2246.27,2130.23 2300,2130.23 1936.27,2148.73 311.96,2164.04 365.69,2164.04 526.88,2164.04 849.27,2164.04 903,2164.04 956.73,2164.04 1010.46,2164.04 1064.19,2164.04 1225.38,2164.04 1279.11,2164.04 1332.84,2164.04 1386.58,2164.04 1440.31,2164.04 105,2178.63 2085.08,2183.96 2138.81,2183.96 473.15,2217.77 526.88,2217.77 849.27,2217.77 903,2217.77 956.73,2217.77 1010.46,2217.77 1064.19,2217.77 1225.38,2217.77 1279.11,2217.77 1332.84,2217.77 1386.58,2217.77 1440.31,2217.77 105,2232.36 2085.08,2237.69 2138.81,2237.69 1668.98,2256.94 419.42,2271.5 473.15,2271.5 526.88,2271.5 795.54,2271.5 849.27,2271.5 903,2271.5 956.73,2271.5 1010.46,2271.5 1064.19,2271.5 1225.38,2271.5 1279.11,2271.5 1332.84,2271.5 1386.58,2271.5 1440.31,2271.5 105,2286.09 1977.61,2291.42 2031.35,2291.42 2085.08,2291.42 2138.81,2291.42 2192.54,2291.42 2246.27,2291.42 2300,2291.42 1611.27,2316.27 311.96,2325.23 365.69,2325.23 419.42,2325.23 1440.31,2325.23 105,2339.82 2085.08,2345.15 2138.81,2345.15 1611.27,2370 311.96,2378.96 365.69,2378.96 419.42,2378.96 1255.1,2383.35 1308.83,2383.35 1665.6,2385 105,2393.55 688.08,2398.88 741.81,2398.88 795.54,2398.88 849.27,2398.88 903,2398.88 956.73,2398.88 1010.46,2398.88 1064.19,2398.88 1308.83,2437.08 1362.56,2437.08 634.34,2452.62 688.08,2452.62 741.81,2452.62 795.54,2452.62 849.27,2452.62 903,2452.62 956.73,2452.62 1010.46,2452.62 1064.19,2452.62 1117.92,2452.62 580.61,2506.35 634.34,2506.35 688.08,2506.35 741.81,2506.35 795.54,2506.35 849.27,2506.35 903,2506.35 956.73,2506.35 1010.46,2506.35 1064.19,2506.35 1117.92,2506.35 1171.65,2506.35 285,2520 1951.27,2535 2005,2535 2058.73,2535 2112.46,2535 2166.19,2535 2219.92,2535 1380,2555 1433.73,2555 526.88,2560.08 580.61,2560.08 634.34,2560.08 688.08,2560.08 741.81,2560.08 795.54,2560.08 849.27,2560.08 903,2560.08 956.73,2560.08 1010.46,2560.08 1064.19,2560.08 1117.92,2560.08 1171.65,2560.08 1225.38,2560.08 1870.15,2560.08 1547.77,2569.07 1433.73,2608.73 45,2613.81 473.15,2613.81 526.88,2613.81 580.61,2613.81 634.34,2613.81 688.08,2613.81 741.81,2613.81 795.54,2613.81 849.27,2613.81 903,2613.81 956.73,2613.81 1010.46,2613.81 1064.19,2613.81 1117.92,2613.81 1171.65,2613.81 1225.38,2613.81 1279.11,2613.81 1870.15,2613.81 1547.77,2622.81 1601.5,2622.81 45,2667.54 419.42,2667.54 473.15,2667.54 526.88,2667.54 580.61,2667.54 634.34,2667.54 688.08,2667.54 741.81,2667.54 795.54,2667.54 849.27,2667.54 903,2667.54 956.73,2667.54 1010.46,2667.54 1064.19,2667.54 1117.92,2667.54 1171.65,2667.54 1225.38,2667.54 1279.11,2667.54 1332.84,2667.54 1870.15,2667.54 1923.88,2667.54 1977.61,2667.54 2031.35,2667.54 2085.08,2667.54 2138.81,2667.54 2192.54,2667.54 2246.27,2667.54 2300,2667.54 45,2721.27 365.69,2721.27 419.42,2721.27 473.15,2721.27 526.88,2721.27 580.61,2721.27 634.34,2721.27 688.08,2721.27 741.81,2721.27 795.54,2721.27 849.27,2721.27 903,2721.27 956.73,2721.27 1010.46,2721.27 1064.19,2721.27 1117.92,2721.27 1171.65,2721.27 1225.38,2721.27 1279.11,2721.27 1332.84,2721.27 1386.58,2721.27 1870.15,2721.27 1923.88,2721.27 2138.81,2721.27 45,2775 311.96,2775 365.69,2775 419.42,2775 473.15,2775 526.88,2775 580.61,2775 634.34,2775 688.08,2775 741.81,2775 795.54,2775 849.27,2775 903,2775 956.73,2775 1010.46,2775 1064.19,2775 1117.92,2775 1171.65,2775 1225.38,2775 1279.11,2775 1332.84,2775 1386.58,2775 1440.31,2775 1494.04,2775 1870.15,2775 1923.88,2775 2138.81,2775 45,2828.73 311.96,2828.73 365.69,2828.73 419.42,2828.73 473.15,2828.73 526.88,2828.73 580.61,2828.73 634.34,2828.73 688.08,2828.73 741.81,2828.73 795.54,2828.73 849.27,2828.73 903,2828.73 956.73,2828.73 1010.46,2828.73 1064.19,2828.73 1117.92,2828.73 1171.65,2828.73 1225.38,2828.73 1279.11,2828.73 1332.84,2828.73 1386.58,2828.73 1440.31,2828.73 1494.04,2828.73 1547.77,2828.73 1601.5,2828.73 1655.23,2828.73 1870.15,2828.73 1923.88,2828.73 1977.61,2828.73 2031.35,2828.73 2085.08,2828.73 2138.81,2828.73 2192.54,2828.73 2246.27,2828.73 2300,2828.73
  other v2: 649.33,573.43 690.67,573.43 649.33,626.57 690.67,626.57
GPIO_RPI: J10.15 U1.20 | length 2822.2
  Top Layer w10: U1.20 261.56,2074.45 295,2041.01 295,1989.88 v1(261.46,1956.34)
  Signal Layer 2 w10: v1(261.46,1956.34) 1705.64,1956.34 1991.5,1670.47 1991.5,1067.38 2053.88,1005 J10.15
LED_A: Q5.1 U1.4 | length 1425.4
  Top Layer w10: U1.4 256.6,2704.37 755,2205.97 755,1809.33 665.67,1720 626.75,1720 616.75,1710 616.75,1665.44 Q5.1@596.69,1645.38
LED_B: Q4.1 U1.5 | length 1319.2
  Top Layer w10: U1.5 270.52,2665 730,2205.52 730,1819.54 662.46,1752 602,1752 590,1740 Q4.1
LED_C: Q3.1 U1.6 | length 1490.3
  Top Layer w10: U1.6 284.43,2625.63 710,2200.06 710,1825 655,1770 572.14,1770 530.14,1728 530.14,1607.36 562.5,1575 Q3.1
LED_D: Q2.1 U1.7 | length 1504.5
  Top Layer w10: U1.7 298.34,2586.26 668.44,2216.16 668.44,1830.37 633.07,1795 545,1795 512.14,1762.14 512.14,1569.11 576.25,1505 Q2.1
M_PIN10: J7.9 U1.10 | length 2491.7
  Top Layer w10: U1.10 390.98,2468.15 624.12,2235.01 v1(624.12,1825)
  Signal Layer 2 w10: v1(624.12,1825) 624.12,1760 686.12,1698 1551.09,1698 1649,1600.09 1649,1345.94 J7.9
M_PIN11: J7.11 U1.11 | length 2566.7
  Top Layer w10: U1.11 404.89,2428.78 588.06,2245.61 v1(588.06,1825)
  Signal Layer 2 w10: v1(588.06,1825) 588.06,1760 668.06,1680 1543.63,1680 1631,1592.63 1631,1263.94 J7.11
M_PIN15: J7.13 U1.15 | length 2500.1
  Top Layer w10: U1.15 378.7,2271.3 552,2098 v1(552,1825)
  Signal Layer 2 w10: v1(552,1825) 552,1760 650,1662 1536.18,1662 1613,1585.18 1613,1181.94 J7.13
M_PIN16: J7.15 U1.16 | length 2580.6
  Top Layer w10: U1.16 392.62,2231.93 515.94,2108.6 v1(515.94,1825)
  Signal Layer 2 w10: v1(515.94,1825) 515.94,1750.57 622.51,1644 1528.72,1644 1595,1577.72 1595,1099.94 J7.15
M_PIN17: J7.7 U1.17 | length 2169.3
  Top Layer w10: U1.17 406.53,2192.56 480,2119.09 v1(480,1855)
  Signal Layer 2 w10: v1(480,1855) 480.5,1855.5 657.5,1855.5 797,1716 1558.54,1716 1667,1607.54 1667,1427.94 J7.7
M_PIN19: J7.16 U1.19 | length 2949.5
  Top Layer w10: U1.19 v1(261.46,2113.82) ; J7.16 1994.94,949.94 2030.5,985.5 2030.5,1730.56 1991.06,1770 v1(1990,1770)
  Signal Layer 2 w10: v1(261.46,2113.82) 322.2,2053.08 1692.38,2053.08 1975.46,1770 v1(1990,1770)
M_PIN27: J7.17 U1.27 | length 1127.9
  Top Layer w10: J7.17 1794.48,899.42 1794.48,979.48 1815,1000 1872.36,1000 1900,1027.64 1900,1700 1799.17,1800.83 U1.27
M_PIN28: J7.18 U1.28 | length 1352.7
  Top Layer w10: U1.28 1862.36,1877.6 1934.96,1805 2013.88,1805 2053.88,1765 2053.88,973.88 1929.94,849.94 J7.18
M_PIN29: J7.2 U1.29 | length 402.9
  Top Layer w10: U1.29 1731.97,1916.97 1705.64,1890.64 1705.64,1828.82 1845,1689.46 J7.2
M_PIN34: J7.4 U1.34 | length 737.1
  Top Layer w10: U1.34 1713.82,2113.82 1673.29,2073.29 1673.29,1835.71 1799.17,1709.83 1799.17,1595.77 J7.4
M_PIN35: J7.1 U1.35 | length 647.3
  Top Layer w10: J7.1 1745,1725 1655.29,1814.71 1655.29,2090 1718.48,2153.19 U1.35
M_PIN36: J7.3 U1.36 | length 800.5
  Top Layer w10: J7.3 1636.27,1658.68 1636.27,2107.04 1721.79,2192.56 U1.36
M_PIN38: J7.6 U1.38 | length 1064.4
  Top Layer w10: U1.38 1738.09,2271.3 1618.27,2151.48 1618.27,1611.07 1729.34,1500 1794.94,1500 J7.6
M_PIN41: J7.5 U1.41 | length 1126.6
  Top Layer w10: J7.5 1600.27,1594.68 1600.27,2266.97 1722.71,2389.41 U1.41
M_PIN45: J7.8 U1.45 | length 1544.4
  Top Layer w10: v1(1583.17,2435) 1582.27,2434.09 1582.27,1527.73 1710,1400 1794.94,1400 J7.8 ; v1(1722.71,2546.89) U1.45
  Signal Layer 2 w10: v1(1583.17,2435) 1583.17,2500 1630.06,2546.89 v1(1722.71,2546.89)
M_PIN46: J7.10 U1.46 | length 1712.2
  Top Layer w10: v1(1547.12,2435) 1547.12,1499.82 1685,1361.94 1685,1325 1708.84,1301.16 1793.78,1301.16 J7.10 ; v1(1722.71,2586.26) U1.46
  Signal Layer 2 w10: v1(1547.12,2435) 1547.12,2502.12 1631.26,2586.26 v1(1722.71,2586.26)
M_PIN50: J7.12 U1.50 | length 2047.4
  Top Layer w10: v1(1511.06,2435) 1511.06,1510.42 1645.28,1376.21 1645.28,1269.72 1715,1200 1794.94,1200 J7.12 ; v1(1722.71,2743.74) U1.50
  Signal Layer 2 w10: v1(1511.06,2435) 1511.06,2710.1 1544.7,2743.74 v1(1722.71,2743.74)
M_PIN51: J7.14 U1.51 | length 2217.2
  Top Layer w10: v1(1475,2435) 1475,1521.03 1627.28,1368.75 1627.28,1172.72 1699.53,1100.47 1794.48,1100.47 J7.14 ; v1(1722.71,2783.11) U1.51
  Signal Layer 2 w10: v1(1475,2435) 1475,2699.5 1558.61,2783.11 v1(1722.71,2783.11)
NetC4_1: C4.1 C5.1 J4.2 J5.1 U1.23 | length 757.9
  Top Layer w10: C4.1 100,1910 C5.1 U1.23
  Top Layer w20: C4.1 84,1905 62,1883 62,1803.41 100.41,1765 215,1765 J5.1 316.96,1636.96 316.96,1543.36 J4.2
NetC17_1: C17.1 C18.1 L7.2 R23.1 R24.2 | length 471
  Top Layer w10: L7.2 761.94,1110 820,1110 877.07,1052.93 877.07,967.2 R24.2
  Top Layer w15: R23.1 C18.1
  Top Layer w20: C18.1 650,1092.99 678.95,1121.94 L7.2
NetC17_2: C17.2 R24.1 R27.2 U11.5 | length 160.2
  Top Layer w10: U11.5 875.97,889.17 R27.2 C17.2 877.07,930 R24.1
NetD5_1: D5.1 J19.1 TP14.1 | length 358.2
  Top Layer w15: J19.1@199.18,782.15 199.18,850.88 221.15,872.84 292.53,872.84 343.77,821.61 D5.1 350.95,804.78 410.07,804.78 v1(435.29,830)
NetD6_A: D6.A D7.A D8.A D9.A J2.2 | length 440.9
  Top Layer w20: J2.2 789.57,1349.26 789.57,1392.14 812.53,1415.11 853.59,1415.11 882.89,1444.4 882.89,1507.53 850.42,1540 D6.A D7.A D9.A D8.A
NetD6_K: D6.K R7.1 | length 59.2
  Top Layer w15: R7.1 D6.K
NetD7_K: D7.K R6.1 | length 59.2
  Top Layer w15: R6.1 D7.K
NetD8_K: D8.K R4.1 | length 59.2
  Top Layer w15: R4.1 D8.K
NetD9_K: D9.K R3.1 | length 59.2
  Top Layer w15: R3.1 D9.K
NetD10_1: D10.1 R9.2 | length 68
  Top Layer w10: D10.1 1068.03,1573.03 R9.2
NetD10_2: D10.2 D10.4 D11.2 D11.4 J3.2 | length 365.5
  Top Layer w20: D11.2 D11.4 D10.2 D10.4 939.85,1531.32 971.56,1499.61 971.56,1367.77 980.97,1358.36 J3.2
NetD10_3: D10.3 R8.2 | length 68.2
  Top Layer w10: D10.3 1067.4,1537.6 R8.2
NetD11_1: D11.1 R5.2 | length 67
  Top Layer w10: D11.1 R5.2@1068.03,1688.03
  Top Layer w20: D11.1 D11.1@1004.12,1686.76
NetD11_3: D11.3 R2.2 | length 64.6
  Top Layer w10: D11.3 R2.2@1067.4,1652.6
NetD14_1: D14.1 J9.1 TP11.1 | length 314.8
  Top Layer w15: J9.1@199.18,307.15 199.18,366.88 220,387.7 303.49,387.7 D14.1 v1(428.98,427.97)
NetD19_K: D19.K R28.1 | length 59.2
  Top Layer w10: R28.1 D19.K
NetD20_K: D20.K R29.2 | length 49
  Top Layer w10: R29.2 D20.K
NetJ6_2: J6.2 U13.11 | length 1012.7
  Top Layer w10: U13.11 U13.11 1277.34,634.06 1336.08,692.8 1515.8,692.8 1567.18,744.18 1567.18,822.9 1551.87,838.22 1551.87,1324.98
NetJ14_2: J14.2 TP1.1 U13.30 | length 1287.4
  Top Layer w10: U13.30 1356.02,285.98 v1(1247,395) 1247,484.65 1180.54,551.1 1180.54,984.97 1395.39,1199.82 J14.2@1395.39,1335
NetJ15_2: J15.2 TP2.1 U13.31 | length 1769.5
  Top Layer w10: J15.2 491.69,1325.15 491.69,1268.25 546.94,1213 989.44,1213 v1(1052.49,1149.94) ; U13.31 1375.71,245.71 v1(1385,255)
  Signal Layer 2 w10: v1(1052.49,1149.94) 1099.85,1102.58 1099.85,631.79 1385,346.65 v1(1385,255)
NetJ17_2: J17.2 U13.14 | length 955.6
  Top Layer w10: U13.14 1197.76,466 1172.99,466 1150.4,488.59 1150.4,1012.8 1249.01,1111.41 1249.01,1311.61 1234.46,1326.16 J17.2
NetJ18_2: J18.2 R30.1 | length 854.2
  Top Layer w10: v1(1117.85,1145) 1117.85,1324.98 J18.2 ; v1(1224.18,616.75) 1234.63,627.2 R30.1
  Signal Layer 2 w10: v1(1117.85,1145) 1117.85,643.24 1144.35,616.75 v1(1224.18,616.75)
NetL7_1: L7.1 U11.3 | length 66.4
  Top Layer w20: U11.3 725.2,1018.2 742.33,1035.33 L7.1
NetQ2_3: Q2.3 R7.2 | length 75.8
  Top Layer w10: Q2.3 645.84,1490.37 645.84,1507.95 677.88,1540 R7.2
NetQ3_3: Q3.3 R6.2 | length 57.2
  Top Layer w10: Q3.3 643.4,1555.32 678.08,1590 R6.2
NetQ4_3: Q4.3 R4.2 | length 45
  Top Layer w10: Q4.3 641.97,1694.13 679.45,1694.13 R4.2
NetQ5_3: Q5.3 R3.2 | length 48.9
  Top Layer w10: Q5.3 650.61,1635.14 678.72,1635.14 R3.2
NetR15_2: R15.2 U9.4 | length 62
  Top Layer w10: R15.2@525.32,580.32 U9.4
NetR25_2: R25.2 U9.2 | length 62
  Top Layer w10: R25.2@525.32,619.68 U9.2
NetR28_2: R28.2 U9.8 | length 1265
  Top Layer w10: R28.2 683.59,1404.38 720,1367.97 720,1307.28 v1(767.28,1260) ; U9.8 912.56,600 995,682.44 995,1026.99 856.99,1165 v1@767.87,1165
  Signal Layer 2 w10: v1(767.28,1165) v1(767.28,1260)
NetR29_1: R29.1 U13.10 | length 391.3
  Top Layer w10: U13.10 1296.97,628.23 1338.74,670 R29.1
NetR30_2: R30.2 U13.12 | length 47.3
  Top Layer w10: R30.2 1257.6,586.91 U13.12
NetR32_2: R32.2 U9.9 | length 62.3
  Top Layer w10: U9.9 R32.2@815,619.68
NF1: C2.2 J8.1 U1.8 | length 1065.3
  Top Layer w10: v1(64.5,2524.99) 86.38,2546.89 C2.2 U1.8
  Signal Layer 2 w10: v1(64.5,2524.99) 39,2499.49 39,1771 J8.1
NF2: C3.2 J8.2 U1.9 | length 1131.6
  Top Layer w10: J8.2 135,1550 39,1646 39,2444.94 101.58,2507.52 C3.2 U1.9
RESET: J6.1 J10.12 SW2.1 SW2.2 U1.37 | length 4143.4
  Top Layer w10: J6.1 1572.14,1324.98 1572.14,848.04 1975.18,445 2250,445 2265,460 2265,1153.88 J10.12 ; U1.37 1876.93,2231.93 v1(1906.4,2261.4) 1906.4,2578.5 1927.9,2600 SW2.1 SW2.2
  Signal Layer 2 w10: v1(1906.4,2261.4) 2273.88,1893.92 2273.88,1265 J10.12
RTS: U13.16
RX_LED_A: R2.1 U1.48 | length 1527.2
  Top Layer w10: R2.1 1129.06,1671.86 1129.06,2379.97 1414.09,2665 U1.48
RX_LED_B: R8.1 U1.43 | length 1530.8
  Top Layer w10: R8.1 1165.06,1592.86 1165.06,2365.06 1268.15,2468.15 U1.43
RXD: J13.1 J15.1 U1.18 | length 1133.3
  Top Layer w10: U1.18 261.82,2153.19 322.96,2092.05 322.96,1909.04 494.14,1737.86 494.14,1554.08 456.38,1516.32 456.38,1466.87 517.1,1406.14 517.1,1349.1 J15.1 J13.1
RXD_RPI: J10.10 J13.2 | length 2977.8
  Top Layer w10: J13.2 663.1,1324.86 756.96,1231 1071.53,1231 v1(1077.53,1237)
  Signal Layer 2 w10: v1(1077.53,1237) 1171.37,1143.16 1171.37,1083.57 1199.18,1055.77 1242.02,1055.77 1262.86,1034.93 1457.88,1034.93 2047.81,445 2250,445 2273.88,468.88 2273.88,1122.93 2241.81,1155 2190,1155 2165,1180 2165,1256.12 J10.10
SCL_RPI: J10.5 U1.40 | length 1030.7
  Top Layer w10: U1.40 v1(1875.63,2350.04)
  Signal Layer 2 w10: v1(1875.63,2350.04) 1875.63,2315.63 1862.9,2302.9 1862.9,2060.44 2035,1888.34 2035,1583.88 J10.5
SDA_RPI: J10.3 U1.42 | length 1015.7
  Top Layer w10: U1.42 v1(1875.63,2428.78)
  Signal Layer 2 w10: v1(1875.63,2428.78) 1901.13,2403.28 1901.13,2308.34 1880.9,2288.11 1880.9,2067.89 2053.88,1894.92 2053.88,1665 J10.3
SPI1_CLK: J10.23 U1.21 | length 3210
  Top Layer w10: U1.21 v1(261.46,2035.08) ; v1(1930,1645) v1(2005,1720)
  Signal Layer 2 w10: v1(261.46,2035.08) 1684.92,2035.08 2002.5,1717.5 v1(2005,1720) ; v1(1930,1645) 1935,1640 1935,723.88 2053.88,605 J10.23
SPI1_MISO: J10.21 U1.26 | length 2936.2
  Top Layer w10: U1.26 v1(261.46,1838.23)
  Signal Layer 2 w10: v1(261.46,1838.23) 286.01,1838.23 332.78,1885 1726.06,1885 1955.5,1655.56 1955.5,803.38 2053.88,705 J10.21
SPI1_MOSI: J10.19 U1.25 | length 2849.7
  Top Layer w10: U1.25 v1(261.46,1877.6)
  Signal Layer 2 w10: v1(261.46,1877.6) 289.6,1877.6 315,1903 1733.52,1903 1973.5,1663.02 1973.5,885.38 2053.88,805 J10.19
SWCLK: J18.1 U1.3 | length 2026.1
  Top Layer w10: U1.3 242.69,2743.74 779.11,2207.31 779.11,1799.94 905.98,1673.07 905.98,1388.03 895.4,1377.44 895.4,1294.6 925,1265 1024.61,1265 1083.03,1323.42 J18.1
SWCLK_OB: J11.4 TP6.1 U13.37 | length 863.1
  Top Layer w10: v1(1210,821) 1304,821 J11.4 ; v1(1468,300.63) 1500.26,268.37 U13.37
  Signal Layer 2 w10: v1(1210,821) 1208.25,819.25 1208.25,686.75 1254.5,640.5 1254.5,502.6 1456.47,300.63 v1(1468,300.63)
SWDIO: J17.1 U1.2 | length 2230.3
  Top Layer w10: U1.2 244.22,2783.11 710.24,2317.09 v1(911.58,2317.09) ; v1(1200,2323.32) 1200,1514.28 1269.28,1445 J17.1@1269.28,1339.52
  Signal Layer 2 w10: v1(911.58,2317.09) 926.52,2332.04 1191.28,2332.04 v1(1200,2323.32)
SWDIO_OB: J11.2 TP4.1 U13.34 | length 783.5
  Top Layer w10: J11.2 1335.49,802.49 1335.49,729.49 1291.01,685 1248.07,685 1198.54,635.47 1198.54,558.56 1265,492.1 1265,415 1434.76,245.24 U13.34
  other v1: 1207.04,650.3
SWO: U13.13
TX_LED_A: R5.1 U1.49 | length 1518.4
  Top Layer w10: R5.1 1107.2,2383.57 1428,2704.37 U1.49
TX_LED_B: R9.1 U1.44 | length 1522.1
  Top Layer w10: R9.1 1147.06,1614.86 1147.06,2372.51 1282.06,2507.52 U1.44
TXD: J10.8 J14.1 U1.22 | length 3022
  Top Layer w10: U1.22 v1(261.46,1995.71) ; J14.1 v1@1435.26,1995.71
  Signal Layer 2 w10: v1(261.46,1995.71) 1691.72,1995.71 2009.5,1677.93 2009.5,1520.5 2075,1455 2163.88,1455 J10.8
  other v1: 1435,1995.71
V_LIPO_BAT: C19.1 J1.1 J12.1 Q1.D U9.10 | length 1046.7
  Top Layer w20: J1.1 313.97,1285 411.43,1187.54 J12.1 463.09,1102.68 552,1013.77 552,870.41 652.41,770 C19.1 695.82,764.18 735.19,764.18 Q1.D 741.69,644.8
VBAT: C20.1 D15.2 Q1.S R22.1 U11.1 U11.4 | length 587.5
  Top Layer w10: U11.4 730,893.97 730,904.81 740.19,915 771,915 800,944 U11.1
  Top Layer w15: D15.2 R22.1
  Top Layer w20: U11.4 669.17,889.17 C20.1 650,842 689,803 820.39,803 Q1.S 833.23,800 910.69,800 D15.2
VRPI: D16.1 J10.2 J10.4 | length 211.6
  Top Layer w20: J10.4 J10.2 D16.1
pads on no net: D15.NC J9.4 J9.6 J10.1 J10.7 J10.11 J10.13 J10.16 J10.17 J10.18 J10.22 J10.26 J11. J11.6 J12.0 J19.4 J19.6 U9.5 U9.6 U13.2 U13.3 U13.4 U13.5 U13.6 U13.15 U13.18 U13.19 U13.20 U13.21 U13.22 U13.25 U13.26 U13.27 U13.28 U13.29 U13.38 U13.39 U13.40 U13.41 U13.42 U13.43 U13.45 U13.46
copper on no net:
  other v1: 1680,1700 1977.61,2345.15 2031.35,2345.15 2192.54,2345.15 2246.27,2345.15 2300,2345.15 2058.73,2481.27 2112.46,2481.27 2166.19,2481.27 2219.92,2481.27 2273.65,2481.27 2273.65,2535 1977.61,2721.27 2031.35,2721.27 2085.08,2721.27 2192.54,2721.27 2246.27,2721.27 2300,2721.27

## Polygon pours and split planes (outlines as drawn)
GND on Top Layer "Bottom Layer-No Net" (solid, remove dead copper, pour order 14): -145,3130 2460,3130 2460,-85 -155,-85 -155,3145
GND on Signal Layer 2 "Bottom Layer-No Net" (solid, remove dead copper, pour order 8): -17.69,3068.67 2502.31,3068.67 2502.31,2648.67 2502.31,-181.33 1797.31,-181.33 1627.31,-181.33 1627.31,437.02 552.99,1511.34 -132.69,1511.34 -132.69,3068.67 117.31,3068.67
3V4_SEGGER on Signal Layer 2 "Bottom Layer-No Net" (solid, remove dead copper, pour order 16): 1361.33,1202.52 1656.33,1202.52 2006.33,820.12 2006.33,99.02 1806.33,-119.5 191.33,-119.5 121.33,-43.02 121.33,448.64 341.33,689.01 846.33,689.01 1006.33,863.82 1006.33,1087.8 1131.33,1224.37 1636.33,1224.37 1656.33,1202.52
3V4 on Signal Layer 2 "Bottom Layer-No Net" (solid, remove dead copper, pour order 5): 315.51,1875.84 729.11,1875.84 1089.11,1515.84 1230.97,1373.98 1230.97,843.45 1230.97,499.39 1037.42,305.84 1032.42,300.84 570.51,300.84 570.51,942.84 430.51,1082.84 194.75,1318.6 194.75,1620.08 194.75,1755.08 315.51,1875.84
5V on Signal Layer 2 "Bottom Layer-No Net" (solid, remove dead copper, pour order 3): -73.43,1802.31 271.25,1802.31 476.57,1596.98 996.57,1076.98 996.57,442.84 821.04,267.31 231.57,267.31 231.57,539.91 -33.43,804.91 -73.43,844.91 -73.43,1802.31
EARTH on Signal Layer 2 "Bottom Layer-No Net" (solid, remove dead copper, pour order 18): -111.84,1045.19 -111.84,-29.81 43.16,-184.81 298.16,-184.81 448.16,-34.81 448.16,1040.8 373.77,1115.19 368.77,1110.19 -21.84,1110.19 -46.84,1110.19 -111.84,1045.19
GND on Signal Layer 1 "Bottom Layer-No Net" (solid, remove dead copper, pour order 10): -195,3150 -195,-190 1455,-190 2595,-190 2595,910 2595,3150 -195,3150
GND on Bottom Layer "Bottom Layer-No Net" (solid, remove dead copper, pour order 12): -349.1,3174.51 2580.91,3174.51 2580.91,399.51 2580.91,-285.49 -459.1,-285.49 -349.1,-285.49 -349.1,3174.51

## Keep-outs
Keep-Out Layer:
  lines w0.5: 5878.48,3660 6461.25,3660 6677.85,3876.61 6677.85,4452.15 ; 6265,3656.44 6265,3733.39 6476.35,3944.74 6476.35,4043.65 6380.39,4139.61 6380.39,4254.16 6254.55,4380 6165.49,4380 6105,4440.49 6105,4640 6075,4670 6004.22,4670 5818.15,4856.07 5818.15,4981.18 ; 5560,4255 5560,3305 5878.48,3305 ; 5560,4255 5560,4981.18 5818.15,4981.18 ; 5560,4255 5787.5,4255 5878.48,4164.02 5878.48,3418.48 5878.48,3305 ; 5818.15,4981.18 5876.97,5040 6010,5040 6046.19,5003.81 6216.19,5003.81 6390,4830 6390,4740 6677.85,4452.15 ; 5878.48,3305 7305,3305 7305,4080.99 7053.49,4332.5 6797.5,4332.5 6677.85,4452.15
  lines w10: 5540,-55 7880,-55 7880,2806.85 5540,2806.85 5540,2649.37 5540,-55 ; 5560,3305 7900,3305 7900,6166.85 5560,6166.85 5560,6009.37 5560,3305

## Other copper
Top Layer:
  pour cut-out: 625,1038.27 625,891 732.05,891 771,929.95 771,980.31 713.04,1038.27

## Silkscreen, mask and mechanical layers (free items; w line width, h text height)
Top Overlay:
  text "+ -" at 85.99,1260 h55 r90
  text "+ -" at 125,1155.68 h55 r270
  text "USB_DEV" at 440,555 h40 r90
  text "USB_MODULE" at 449,42.46 h40 r90
Bottom Overlay:
  text "J-Link OB" at 796.48,925.56 h69
  text "www.segger.com" at 1045.48,872.82 h69
  text "PDOA NODE_DEV_V2" at 838.6,134.68 h40
  text "20180730" at 838.6,60.68 h40
M2_OUTLINE:
  lines w10: 0,0 0,2704.37 0,2861.85 2340,2861.85 2340,0 0,0
M3_PANEL:
  lines w5: -236.22,2861.85 0,2861.85 4896.36,2861.85 5132.58,2861.85 ; -236.22,4130 0,4130 ; -236.22,6991.85 0,6991.85 4896.36,6991.85 5132.58,6991.85 ; 0,-236.22 0,0 ; -0.02,48.34 cw(c-32.93,48.32) -65.85,48.32 -65.85,463.19 -65.85,938.19 cw(c-32.93,938.21) -0.02,938.21 ; -0.02,4178.34 cw(c-32.93,4178.32) -65.85,4178.32 -65.85,4593.19 -65.85,5068.19 cw(c-32.93,5068.21) -0.02,5068.21 ; 1875,2861.85 2340,2861.85 ; 1875,6991.85 2340,6991.85 ; 2556.36,-236.22 2556.36,0 ; 2556.34,48.34 cw(c2523.43,48.32) 2490.52,48.32 2490.52,463.19 2490.52,938.19 cw(c2523.43,938.21) 2556.34,938.21 ; 2556.34,4178.34 cw(c2523.43,4178.32) 2490.52,4178.32 2490.52,4593.19 2490.52,5068.19 cw(c2523.43,5068.21) 2556.34,5068.21 ; 5132.58,0 4896.36,0 ; 5132.58,4130 4896.36,4130 ; -236.22,0 -236.22,8260 0,8260 ; -236.22,0 0,0 ; -236.22,0 -236.22,-236.22 4896.36,-236.22 ; 0,0 2340,0 ; 0,0 0,3010 0,4130 ; 0,4130 0,7140 0,8260 ; 0,4130 2340,4130 ; 0,4130 2340,4130 ; 0,8260 2340,8260 ; 0,8260 2340,8260 ; 2340,0 2340,3010 2340,4130 ; 2340,0 2556.36,0 ; 2340,4130 2556.36,4130 ; 2340,4130 2340,7140 2340,8260 ; 2340,4130 2556.36,4130 ; 2340,8260 2556.36,8260 ; 2340,8260 2556.36,8260 ; 2556.36,0 2556.36,3010 2556.36,4130 ; 2556.36,0 4896.36,0 ; 2556.36,4130 4896.36,4130 ; 2556.36,4130 2556.36,7140 2556.36,8260 ; 2556.36,4130 4896.36,4130 ; 2556.36,8260 4896.36,8260 ; 2556.36,8260 4896.36,8260 ; 4896.36,-236.22 4896.36,0 ; 4896.36,-236.22 5132.58,-236.22 5132.58,8260 4896.36,8260 ; 4896.36,0 4896.36,3010 4896.36,4130 ; 4896.36,4130 4896.36,7140 4896.36,8260
  lines w10: -141.34,8649.22 0,8507.88 ; 0,9244.17 0,8507.88 ; 141.34,8649.22 0,8507.88 ; 2198.66,8649.22 2340,8507.88 ; 2340,9244.17 2340,8507.88 ; 2415.02,8649.22 2556.36,8507.88 ; 2481.34,8649.22 2340,8507.88 ; 2556.36,9244.17 2556.36,8507.88 ; 2697.7,8649.22 2556.36,8507.88 ; 4755.02,8649.22 4896.36,8507.88 ; 4896.36,9244.17 4896.36,8507.88 ; 5037.7,8649.22 4896.36,8507.88 ; 5517.49,-141.31 5376.14,0.03 ; 5517.49,141.37 5376.14,0.03 ; 5517.49,2720.54 5376.14,2861.88 ; 5517.49,3003.22 5376.14,2861.88 ; 5517.49,3988.69 5376.14,4130.03 ; 5517.49,4271.37 5376.14,4130.03 ; 5517.49,6850.54 5376.14,6991.88 ; 5517.49,7133.22 5376.14,6991.88 ; 6112.43,0.03 5376.14,0.03 ; 6112.43,2861.88 5376.14,2861.88 ; 6112.43,4130.03 5376.14,4130.03 ; 6112.43,6991.88 5376.14,6991.88
  text "V-CUT" at 41.65,9314.29 h100 r90
  text "V-CUT" at 2381.65,9314.29 h100 r90
  text "V-CUT" at 2598.01,9314.29 h100 r90
  text "V-CUT" at 4938.01,9314.29 h100 r90
  text "V-CUT" at 6182.56,6950.24 h100
  text "V-CUT" at 6182.56,4088.39 h100
  text "V-CUT" at 6182.56,2820.24 h100
  text "V-CUT" at 6182.56,-41.61 h100
M7_MODULE:
  lines w5: 185,2861.85 1799.17,2861.85 ; 185,1779.17 185,4042.95 1799.17,4042.95 1799.17,1779.17 185,1779.17

## Dimensions
2340,2861.85 to 2340,0 on M4_DRAFT
0,0 to 2340,0 on M4_DRAFT

## Text inside footprints (layer, text, board x,y; h text height)
D6: Top Overlay "+" at 870,1550 h20 r180
D7: Top Overlay "+" at 870,1600 h20 r180
D8: Top Overlay "+" at 870,1700 h20 r180
D9: Top Overlay "+" at 870,1650 h20 r180
D19: Top Overlay "+" at 870,1500 h20 r180
D20: Top Overlay "+" at 1682.94,580 h20 r90